# Altium PCB transmitter_2.PcbDoc
Units mm, origin at the board's own origin, x right, y up, seen from the top; angles counter-clockwise.
Board outline 99.5 x 89.75 mm, 2 copper layers (F.Cu, B.Cu); 60 components, 35 nets, 158 pads, 157 vias.
Unrouted connection lines stored in the file: 2.
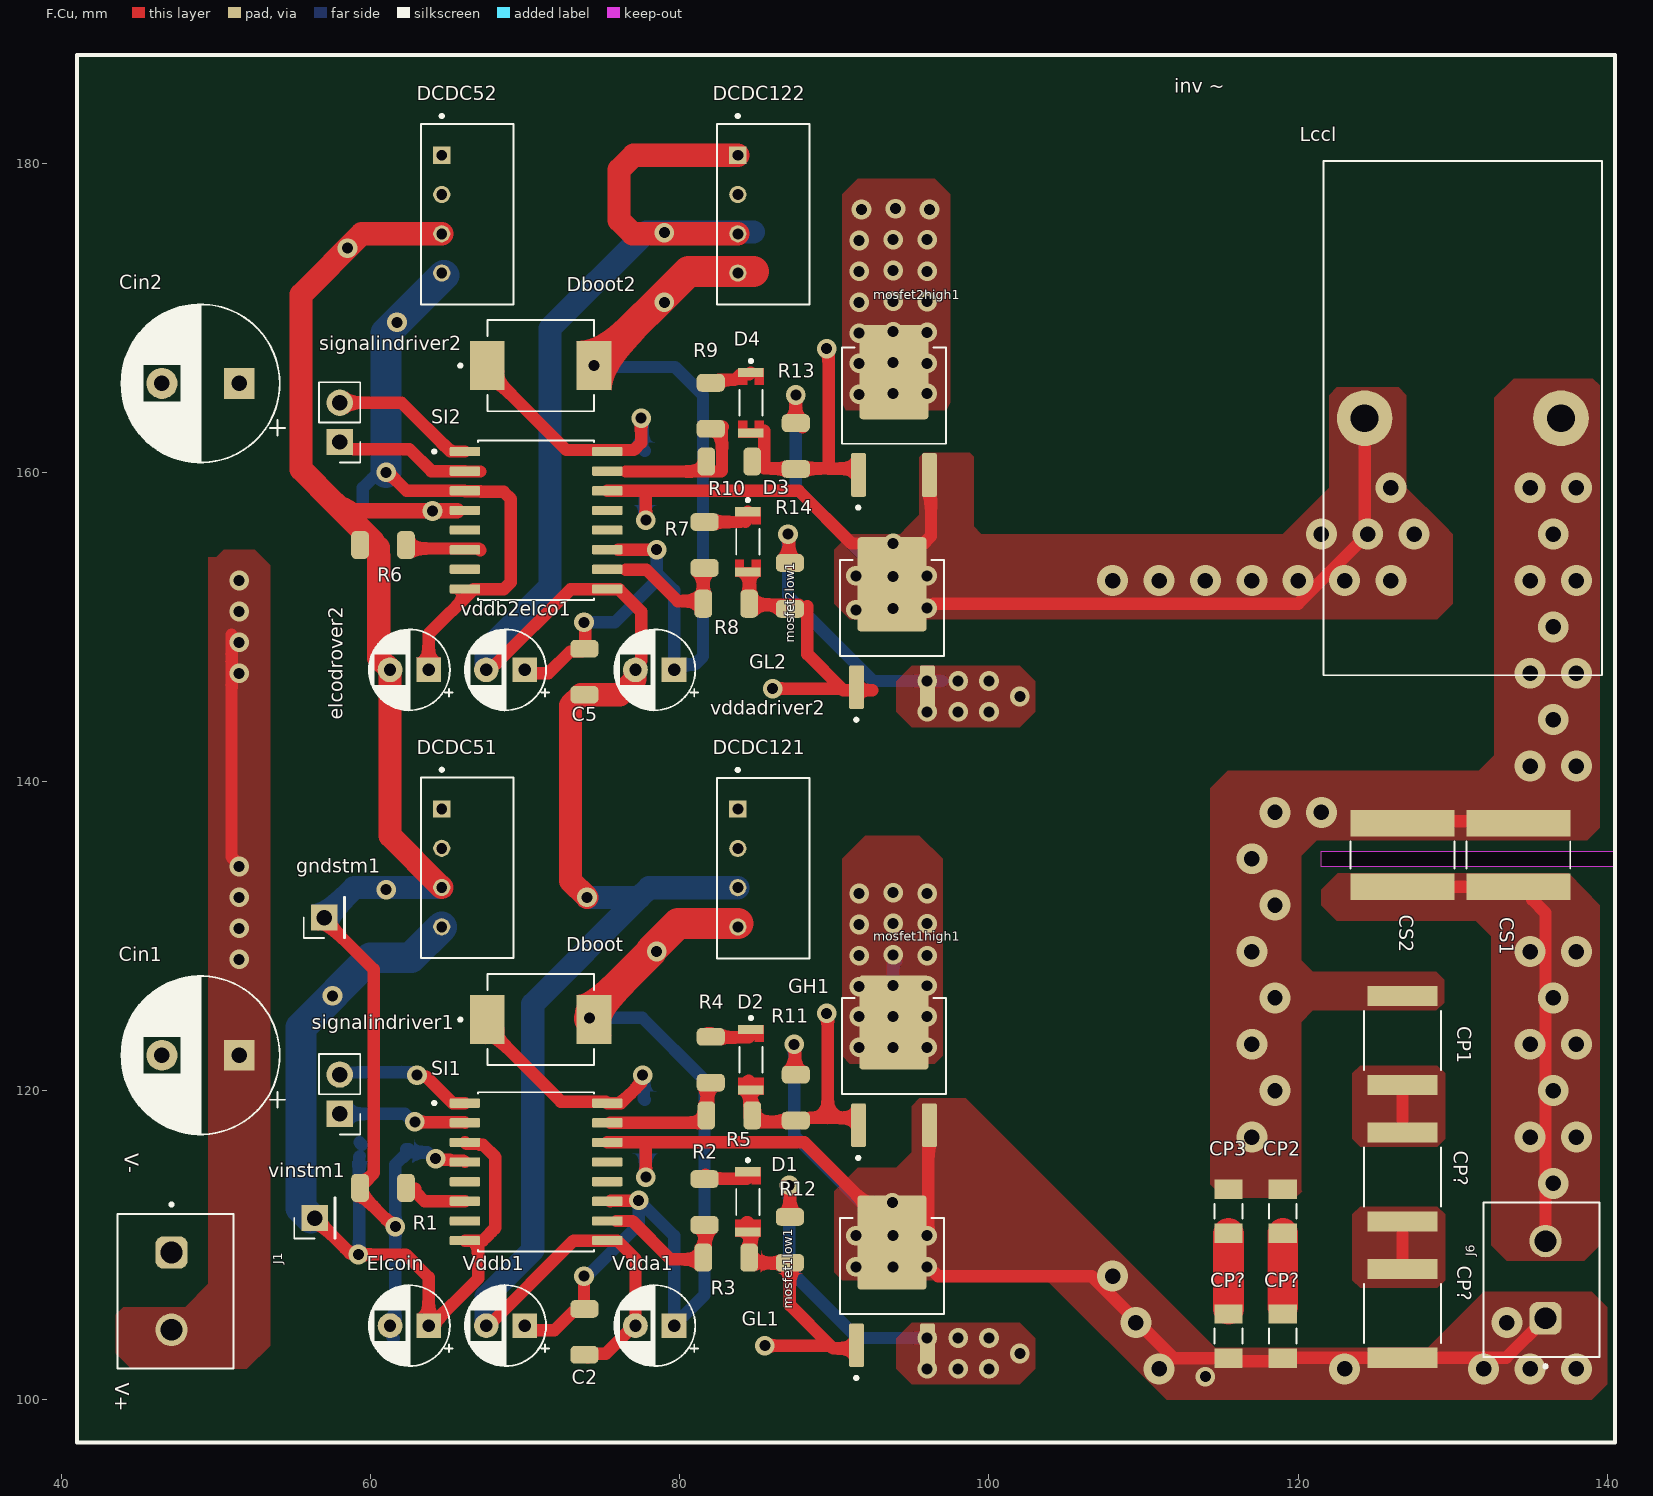
[diagram p0: F.Cu view]
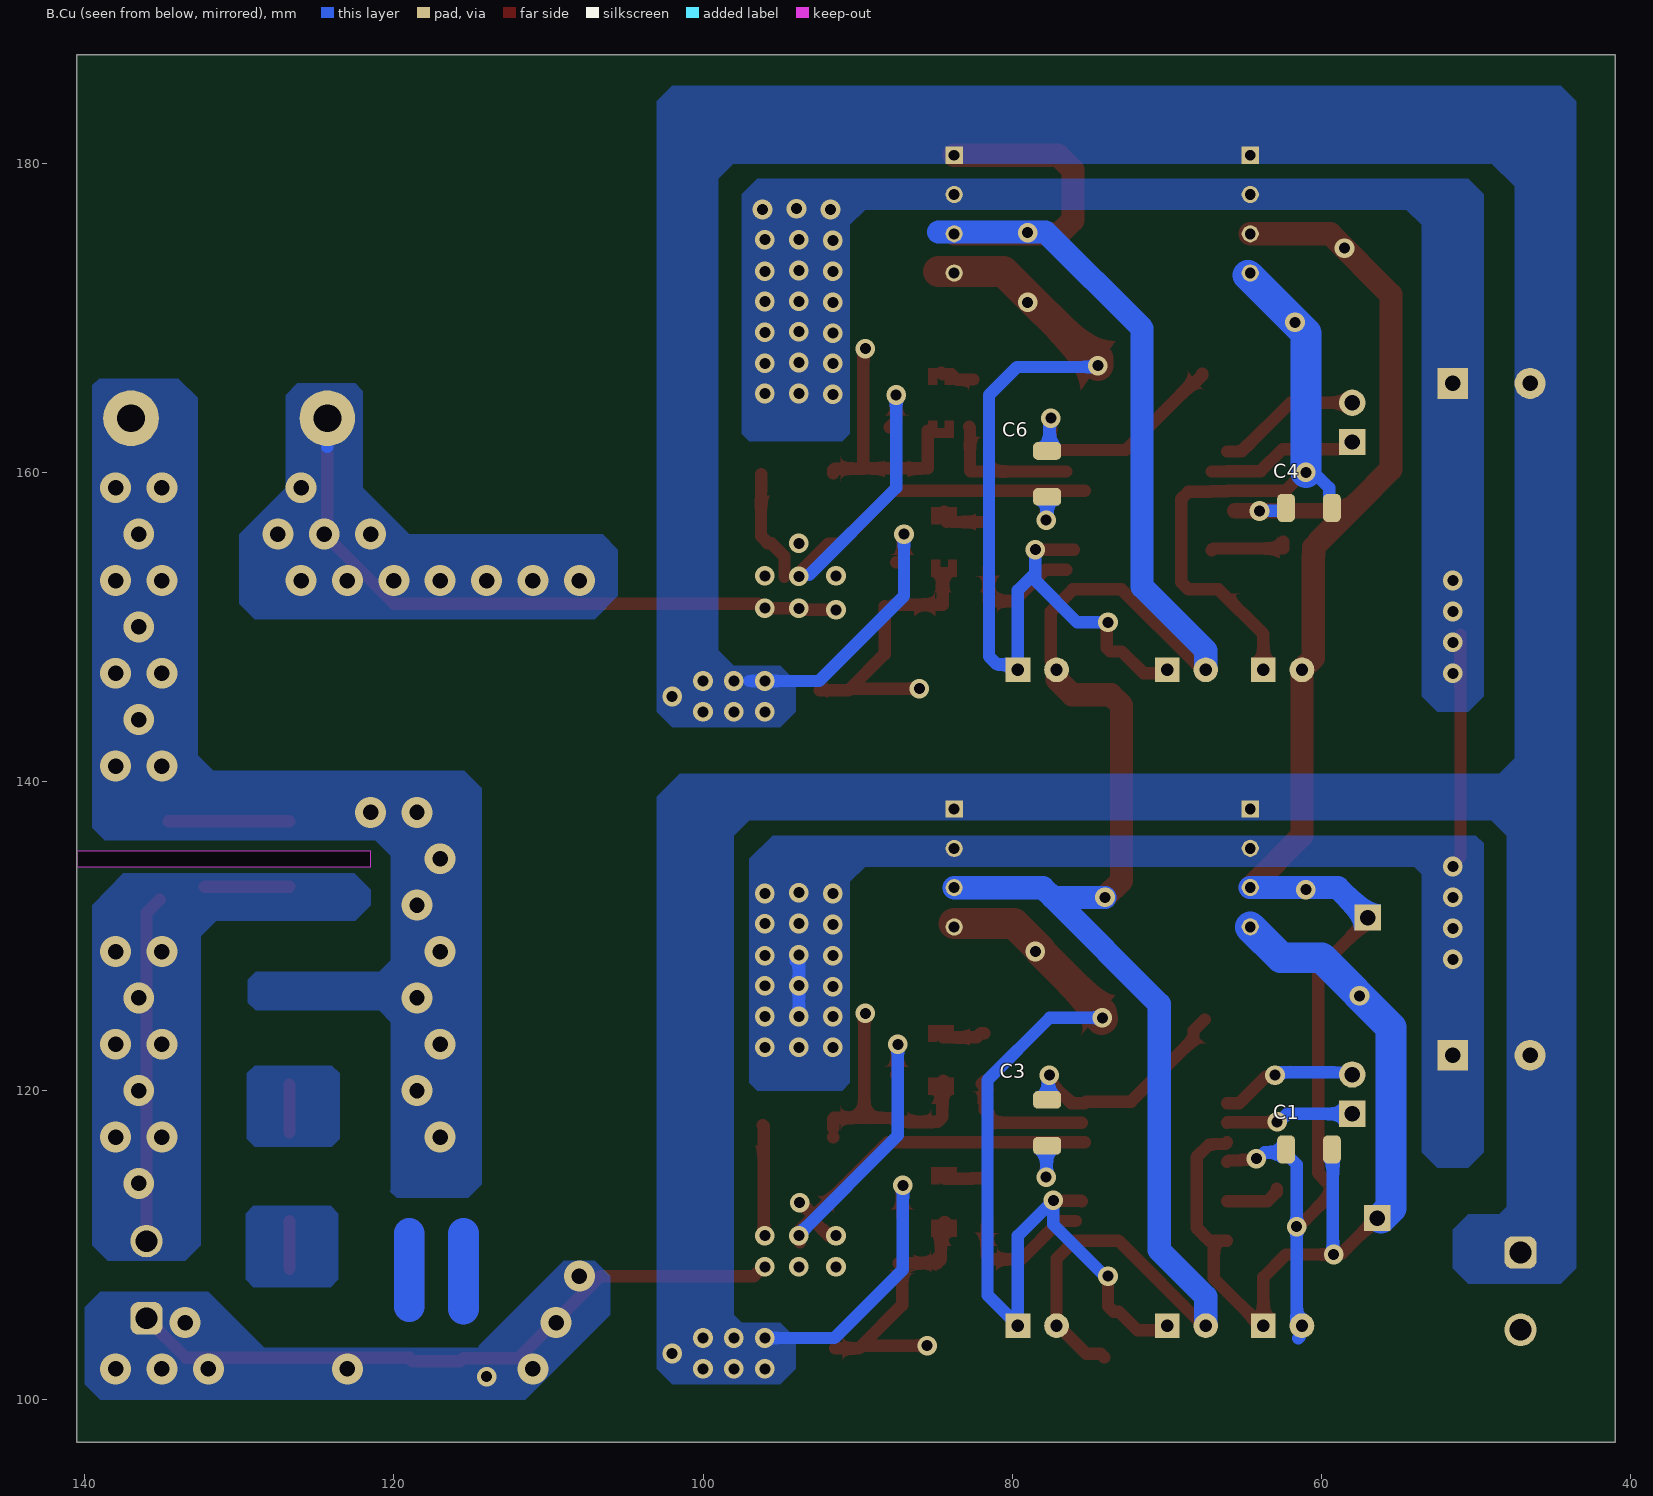
[diagram p1: B.Cu view, seen from below]
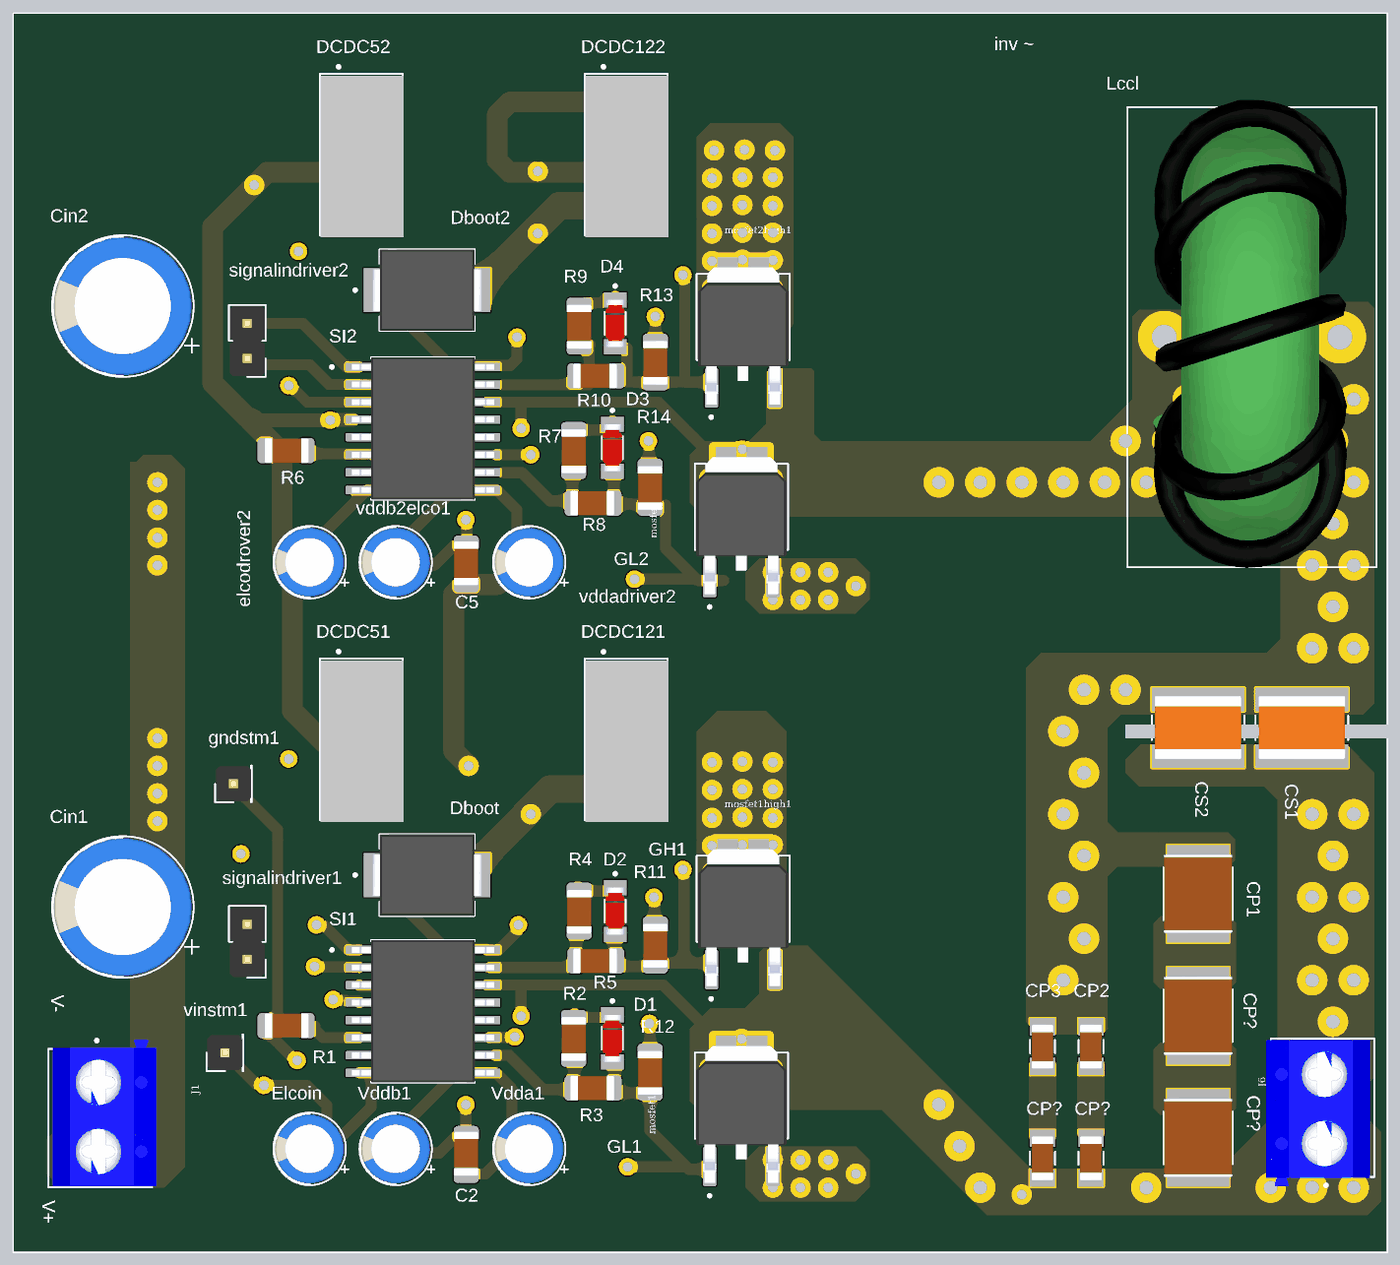
[diagram p2: 3D render of the assembled board from above, using the file's embedded part models]
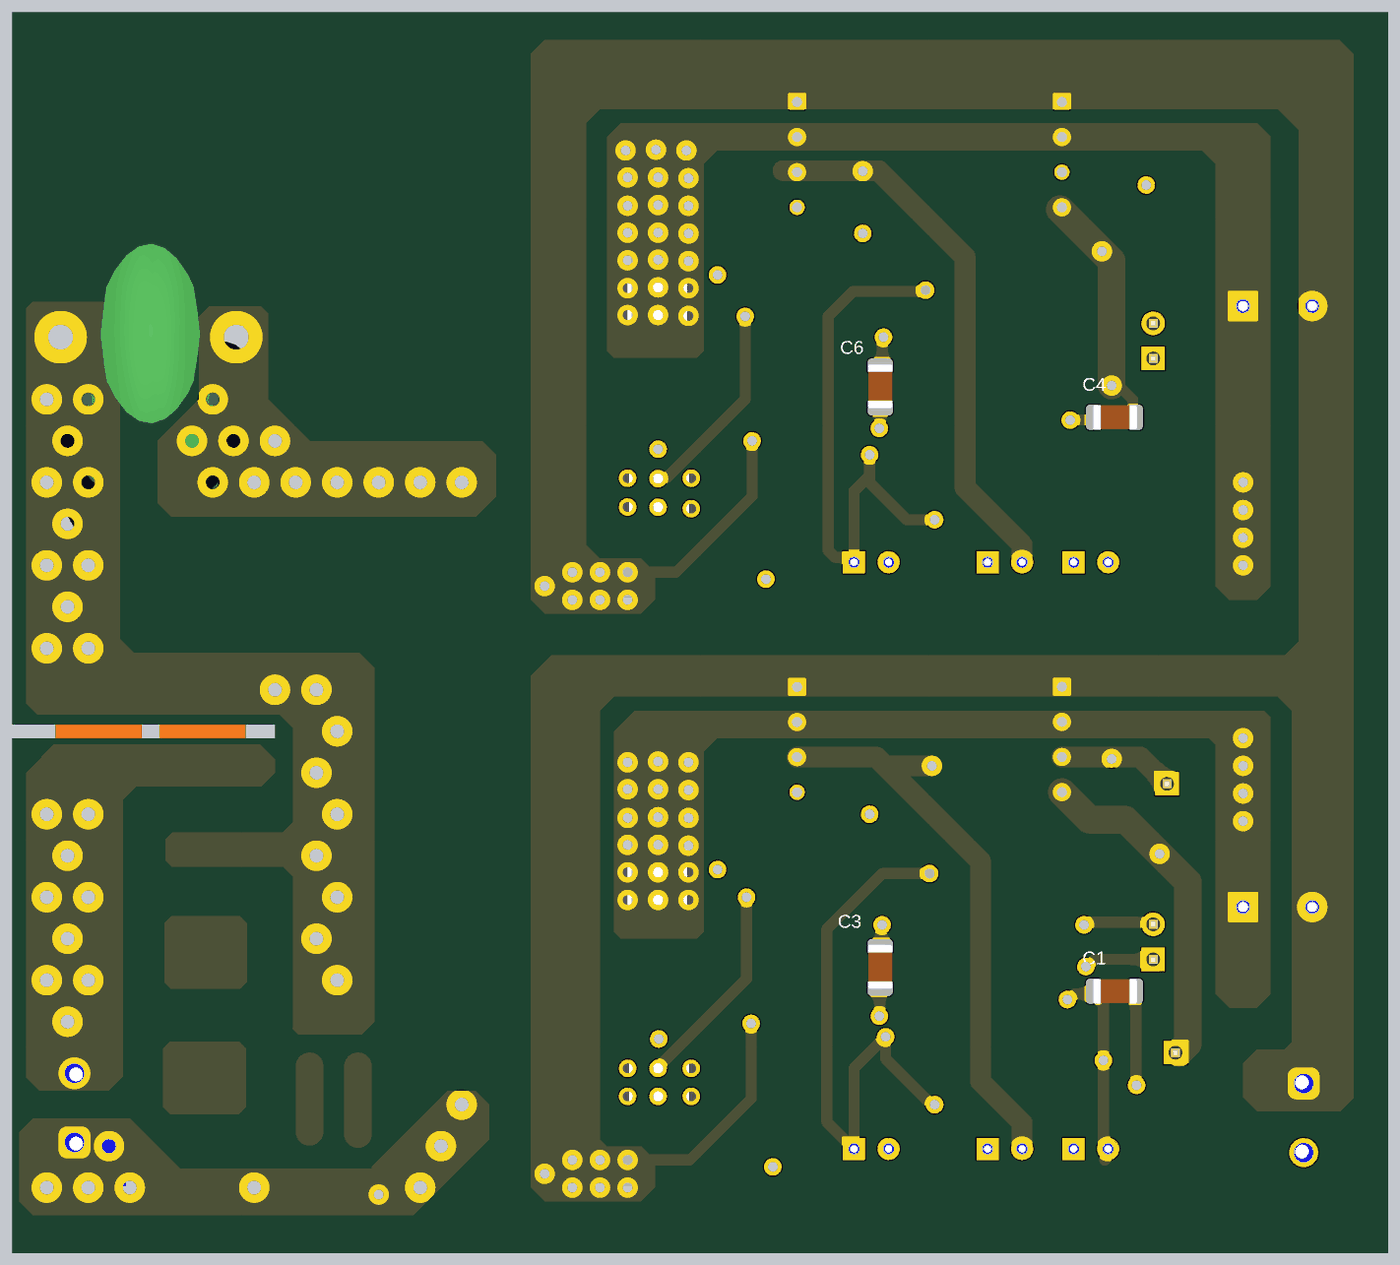
[diagram p3: 3D render of the assembled board from below, using the file's embedded part models]

## Layer stack, top to bottom
F.Mask: solder mask 0.0102, Solder Resist, Dk 3.5
F.Cu: signal copper 0.0356
Dielectric 1: dielectric 0.32, FR-4, Dk 4.8
B.Cu: signal copper 0.0356
B.Mask: solder mask 0.0102, Solder Resist, Dk 3.5

## Board outline
41,97.25 41,187 140.5,187 140.5,97.25
cut-out: 121.5,134.5 121.5,135.5 140.5,135.5 140.5,134.5

## Design rules (kind name [scope] priority, off if disabled: settings)
Clearance "Clearence 0,2_NetClass" [InNetClass('Default')] p1: gap=0.3 ignorepadtopadclearanceinfootprint=FALSE
ComponentClearance [All] p1: gap=0.254 collisioncheckmode=3 verticalgap=0 showdistances=FALSE
Height [All] p1: minheight=0 maxheight=100 prefheight=12.7
HoleSize "Hole Size (Default)" [All] p1: absolutevalues=TRUE maxlimit=10 minlimit=0 maxpercent=80.000 minpercent=20.000
MinimumSolderMaskSliver [All] p1: minsoldermaskwidth=0
PolygonConnect [All] p1: connectstyle=Direct reliefconductorwidth=0.254 reliefentries=4 polygonreliefangle="90 Angle" airgapwidth=0.254
RoutingVias [All] p1: holewidth=0.711 width=1.27 viastyle="Through Hole" minholewidth=0.711 minwidth=1.27 maxholewidth=0.711 maxwidth=1.27
SilkToSilkClearance [All] p1: silktosilkclearance=0
SilkToSolderMaskClearance [IsPad] p1: minsilkscreentomaskgap=0 clearancetoexposedcopper=TRUE
SolderMaskExpansion [All] p1: expansion=0.102 istentingtop=FALSE
Width [All] p1: maxlimit=10 minlimit=0.25 preferedwidth=0.8 minimp=50.000000 maximp=50.000000 favimp=50.000000
24 further rules are at their usual default settings.

## Components (designator, comment, footprint, x,y, rotation, side; value= is the part's Value field where it differs from the comment)
C1 "C_Small" 1206 60.8,116.2 r0 bottom
C2 "C_Small" 1206 73.829,104.4 r270 top
C3 "C_Small" 1206 77.738,117.923 r270 bottom
C4 "C_Small" 1206 60.8,157.7 r0 bottom
C5 "C_Small" 1206 73.829,147.1 r270 top
C6 "C_Small" 1206 77.738,159.9 r270 bottom
Cin1 "Elcofilter" C820uf25V 51.5,122.29 r180 top
Cin2 "Elcofilter" C820uf25V 51.5,165.75 r180 top
CP1 "MLCC_0.2uF" MLCC2220_0.2uF 126.75,123.25 r270 top
CP2 "MLCC_0.1uF" MLCC1206_0.1uF 119,112.2 r270 top
CP3 "MLCC_0.1uF" MLCC1206_0.1uF 115.5,112.2 r270 top
CP? "MLCC_0.1uF" MLCC1206_0.1uF 119,104.125 r270 top
CP? "MLCC_0.1uF" MLCC1206_0.1uF 115.5,104.125 r270 top
CP? "MLCC_0.2uF" MLCC2220_0.2uF 126.75,105.595 r270 top
CP? "MLCC_0.2uF" MLCC2220_0.2uF 126.75,114.422 r270 top
CS1 "MLCC_0.01uF" MLCC1825_0.01uF 134.25,135.25 r270 top
CS2 "MLCC_0.01uF" MLCC1825_0.01uF 126.75,135.25 r270 top
D1 "D_Small" DIO_LL4148 84.4,112.8 r270 top
D2 "D_Small" DIO_LL4148 84.6,122 r270 top
D3 "D_Small" DIO_LL4148 84.4,155.5 r270 top
D4 "D_Small" DIO_LL4148 84.6,164.5 r270 top
Dboot "D_Schottky" Schottky 71,124.6 r0 top
Dboot2 "D_Schottky" Schottky 71,166.9 r0 top
DCDC51 "B1205S_DCDC" DCDC5V 66.25,134.41 r270 top
DCDC52 "B1205S_DCDC" DCDC5V 66.25,176.7 r270 top
DCDC121 "B1212S_DCDC" DCDC5V 85.4,134.4 r270 top
DCDC122 "B1212S_DCDC" DCDC5V 85.4,176.7 r270 top
elcodrover2 "CP1_Small" CP_Radial_D5.0mm_P2.50mm 63.754,147.222 r180 top
Elcoin "CP1_Small" CP_Radial_D5.0mm_P2.50mm 63.754,104.8 r180 top
gndstm1 "Conn_01x01" PinHeader_1x01_P2.54mm_Vertical 57,131.2 r90 top
J1 "Screw_Terminal_01x02" Terminal 47.117,107.032 r270 top
J6 "Screw_Terminal_01x02" Terminal 136,107.768 r90 top
Lccl "L" Inductor 124.3,163.5 r90 top
mosfet1high1 "Q_NMOS_GDS" MOSFET 93.853,121.904 r90 top
mosfet1low1 "Q_NMOS_GDS" MOSFET 93.726,107.67 r90 top
mosfet2high1 "Q_NMOS_GDS" MOSFET 93.853,163.97 r90 top
mosfet2low1 "Q_NMOS_GDS" MOSFET 93.726,150.244 r90 top
R1 "R_Small" 1206 60.8,113.71 r180 top
R2 "R_Small" 1206 81.6,112.8 r90 top
R3 "R_Small" 1206 83,109.2 r0 top
R4 "R_Small" 1206 82,122 r90 top
R5 "R_Small" 1206 83.2,118.4 r0 top
R6 "R_Small" 1206 60.8,155.3 r180 top
R7 "R_Small" 1206 81.6,155.3 r90 top
R8 "R_Small" 1206 83,151.5 r0 top
R9 "R_Small" 1206 82,164.3 r90 top
R10 "R_Small" 1206 83.2,160.7 r0 top
R11 "R" 1206 87.503,119.55 r90 top
R12 "R" 1206 87.122,110.35 r90 top
R13 "R" 1206 87.503,161.7 r90 top
R14 "R" 1206 87.122,152.65 r90 top
SI1 "Si8233" Si8233 70.705,114.748 r0 top
SI2 "Si8233" Si8233 70.705,156.9 r0 top
signalindriver1 "Conn_01x02" PinHeader_1x02_P2.54mm_Vertical 58,118.5 r180 top
signalindriver2 "Conn_01x02" PinHeader_1x02_P2.54mm_Vertical 58,161.96 r180 top
Vdda1 "CP1_Small" CP_Radial_D5.0mm_P2.50mm 79.629,104.8 r180 top
vddadriver2 "CP1_Small" CP_Radial_D5.0mm_P2.50mm 79.629,147.222 r180 top
Vddb1 "CP1_Small" CP_Radial_D5.0mm_P2.50mm 69.977,104.8 r180 top
vddb2elco1 "CP1_Small" CP_Radial_D5.0mm_P2.50mm 69.977,147.222 r180 top
vinstm1 "Conn_01x01" PinHeader_1x01_P2.54mm_Vertical 56.388,111.76 r90 top

## Footprints (in the part's own frame and the unit in brackets; to place one, negate y for a bottom-side part, rotate by r counter-clockwise, add the part's x,y. Pads: shape width x height; smd on the part's side, far side on the other; paste and mask are expansions set on the pad)
1206 [mm]
  rrect54% 1.15x1.82 smd: 1(-1.485,0) 2(1.485,0)
  body extent -1.65,-0.9 1.55,0.9, height 1.56
C820uf25V [mm]
  rect 2x2 hole 1: 1(0,0)
  round 2 hole 1: 2(5,0)
  silkscreen extent -2.98,-5.12 7.62,5.12, body extent -2.5,-5 7.5,5, height 10
CP_Radial_D5.0mm_P2.50mm [mm]
  rect 1.6x1.6 hole 0.8: 1(0,0)
  round 1.6 hole 0.8: 2(2.5,0)
  silkscreen extent -1.55,-2.62 3.87,2.62, body extent -1.25,-2.5 3.75,2.5, height 5
DCDC5V [mm]
  rect 1.11x1.11 / inner round 1.11 / far side rect 1.11x1.11 hole 0.71: 1(-3.81,-1.65)
  round 1.11 hole 0.71: 2(-1.27,-1.65) 3(1.27,-1.65) 4(3.81,-1.65)
  silkscreen extent -6.45,-3 5.84,3, body extent -5.71,-2.95 5.97,3.05, height 10.77
DIO_LL4148 [mm]
  rect 0.6x1.65 smd: 1(-1.95,0) 2(1.95,0)
  F.Cu region: 2.25,-0.825 1.15,-0.825 1.15,-0.25 1.65,-0.25 1.65,0.25 1.15,0.25 1.15,0.825 2.25,0.825
  F.Cu region: -1.15,0.25 -1.65,0.25 -1.65,-0.25 -1.15,-0.25 -1.15,-0.825 -2.24,-0.825 -2.24,0.825 -1.15,0.825
  silkscreen extent -2.8,-0.75 0.83,0.75, body extent -1.7,-0.7 1.7,0.7, height 1.4
Inductor [mm]
  round 3.6 hole 1.8: 1(0,0) 2(0,-12.7)
  silkscreen extent -16.63,-15.36 16.63,2.66, body extent -23.39,-13.22 24.14,0.78, height 36.79
MLCC1206_0.1uF [mm]
  rect 1.25x1.82 smd: 1(-1.43,0) 2(1.43,0)
  silkscreen extent -0.48,-0.9 0.48,0.9, body extent -1.6,-0.8 1.6,0.8, height 1.8
MLCC1825_0.01uF [mm]
  rect 1.71x6.71 smd: 1(-2.05,0) 2(2.05,0)
  silkscreen extent -0.88,-3.35 0.88,3.35, body extent -2.31,-3.15 2.29,3.15, height 3.4
MLCC2220_0.2uF [mm]
  rect 1.3x4.5 smd: 1(-2.875,0) 2(2.875,0)
  silkscreen extent -1.91,-2.5 1.91,2.5, body extent -2.85,-2.5 2.85,2.5, height 2.8
MOSFET [mm]
  rrect25% 2.83x0.97 smd: 1(-4.14,2.29) 3(-4.14,-2.29)
  rrect10% 6.1x4.49 smd paste-4: 2(2.51,0)
  silkscreen extent -6.35,-3.37 4.1,3.37, body extent -5.33,-3.27 4.57,3.27, height 2.39
PinHeader_1x01_P2.54mm_Vertical [mm]
  rect 1.7x1.7 hole 1: 1(0,0)
  silkscreen extent -1.33,-1.33 1.33,1.33, body extent -1.27,-1.27 1.27,1.27, height 8.54
PinHeader_1x02_P2.54mm_Vertical [mm]
  rect 1.7x1.7 hole 1: 1(0,0)
  rrect100% 1.7x1.7 hole 1: 2(0,-2.54)
  silkscreen extent -1.33,-3.87 1.33,1.33, body extent -1.27,-3.81 1.27,1.27, height 8.54
Schottky [mm]
  rect 2.25x3.18 smd: A(3.455,0) C(-3.455,0)
  silkscreen extent -5.3,-2.95 3.44,2.95, body extent -3.98,-2.95 3.98,2.95, height 2.65
Si8233 [mm]
  rrect25% 1.97x0.6 smd: 1(-4.605,4.445) 2(-4.605,3.175) 3(-4.605,1.905) 4(-4.605,0.635) 5(-4.605,-0.635) 6(-4.605,-1.905) 7(-4.605,-3.175) 8(-4.605,-4.445) 9(4.605,-4.445) 10(4.605,-3.175) 11(4.605,-1.905) 12(4.605,-0.635) 13(4.605,0.635) 14(4.605,1.905) 15(4.605,3.175) 16(4.605,4.445)
  silkscreen extent -6.69,-5.15 3.75,5.15, body extent -5.15,-5.15 5.15,5.15, height 2.65
Terminal [mm]
  rrect50% 2.1x2.1 hole 1.4: 1(-2.5,0)
  round 2.1 hole 1.4: 2(2.5,0)
  silkscreen extent -5.7,-3.5 5,4, body extent -5.68,-3.18 4.92,4.32, height 10

## Via types
v1: diameter 1.27, hole 0.711, F.Cu to B.Cu, 109 vias
v2: diameter 2, hole 1, F.Cu to B.Cu, 48 vias

## Nets (pads, with @x,y where several pads share a name; then routed paths per layer and width w, separated by ;. In a path a pad name is that pad's centre, name@x,y a point inside that pad or via, vN(x,y) a via of type N, cw(c..) or ccw(c..) an arc to the next point about the centre after c; other vN are vias at no path point)
GNDB1: C2.2 C5.2 Cin1.2 Cin2.2 DCDC51.1 DCDC52.1 DCDC121.1 DCDC121.3 DCDC122.1 DCDC122.3 J1.1 mosfet1low1.3 mosfet2low1.3 R12.2 R14.2 SI1.9 SI2.9 Vdda1.2 vddadriver2.2 Vddb1.2 vddb2elco1.2 | length 192.4
  F.Cu w0.8: Vddb1.2@67.477,104.648 73.132,110.303 75.95,110.303 77.129,109.124 Vdda1.2 ; vddb2elco1.2 67.693,147.222 68.093,147.622 68.122,147.622 72.929,152.429 76.071,152.429 77.5,151 vddadriver2.2@77.5,147.809 ; C2.2@74.05,102.743 74.05,102.752 74.287,102.989 75.216,102.989 76.722,104.495 76.886,104.495 Vdda1.2@77.256,104.864 ; v1(87,156) 87.061,155.939 87.061,154.31 87.193,154.178 R14.2@87.5,154.178 ; v1(87.071,113.873) 87.122,113.822 R12.2
  F.Cu w1.5: C5.2@73.615,145.615 72.919,144.919 72.919,133.581 v1(74,132.5) ; C5.2 76.115,145.615 77.11,146.61 77.11,147.203 vddadriver2.2 ; DCDC122.3 76.949,175.43 76.07,176.309 76.07,179.57 77.01,180.51 DCDC122.1
  B.Cu w0.8: v1(87,156) 87,152 92.5,146.5 97,146.5 ; v1(87.071,113.873) 87.071,108.429 91.5,104 v1(96,104)
  B.Cu w1.5: Vddb1.2@67.477,104.902 67.477,106.677 70.485,109.685 70.485,125.603 77.382,132.5 ; vddb2elco1.2 67.477,148.477 71.6,152.6 71.6,169.308 77.835,175.543 84.76,175.543 ; v1(74,132.5) 77.382,132.5 ; DCDC121.3 78.012,133.13 77.382,132.5
  other v1: 96,102 98,102 100,102 102,103 98,104 100,104 96,144.5 98,144.5 100,144.5 102,145.5 96,146.5 98,146.5 100,146.5 79,175.5
GNDI: C1.2 C4.2 DCDC51.3 DCDC52.3 elcodrover2.2 Elcoin.2 gndstm1.1 R1.2 R6.2 SI1.4 SI2.4 | length 108.5
  F.Cu w0.8: gndstm1.1@57,131.048 57.152,131.048 57.45,130.75 57.45,130.597 60.2,127.847 60.2,114.688 59.731,114.22 59.49,114.22 59.315,114.045 R1.2 ; R1.2@59.315,113.375 61.49,111.2 v1(61.6,111.2) ; v1(64.2,115.6) 64.264,115.536 65.131,115.536 65.183,115.483 66,115.483 SI1.4
  F.Cu w1: 58.5,157.5 v1(64,157.5) 64.017,157.518 SI2.4@65.615,157.518
  F.Cu w1.5: 57.679,158.007 55.5,160.186 55.5,171.5 59.43,175.43 DCDC52.3 ; 57.785,157.901 58.162,157.524 60.226,155.46 ; 58.268,157.63 58.5,157.5 ; 60.49,155.14 60.49,154.635 60.525,154.6 60.525,147.978 61.254,147.249 elcodrover2.2 61.254,136.486 64.47,133.27 DCDC51.3
  B.Cu w0.8: Elcoin.2 61.407,104.647 61.407,104.081 61.5,103.988 ; Elcoin.2@61.595,105.136 61.595,115.221 62.064,115.69 62.11,115.69 62.285,115.865 C1.2 ; C1.2@62.46,116.2 62.46,116.011 63.662,116.011 64.073,115.6 v1(64.2,115.6) ; C4.2@62.46,157.5 62.46,157.524 63.976,157.524 v1(64,157.5)
  B.Cu w1.5: gndstm1.1 58.94,133.14 DCDC51.3
  other v1: 61,133 58.5,174.5
HS1: C3.2 CP?.2@115.5,102.695 CP?.2@119,102.695 CP?.2@126.75,102.72 J6.1 mosfet1high1.3 mosfet1low1.2 R11.2 SI1.14 | length 97.2
  F.Cu w0.8: SI1.14 77.841,116.653 ; v1(77.8,114.4) 77.8,116.612 77.841,116.653 ; v1(87.4,123) 87.452,122.948 87.452,121.087 R11.2 ; v1(91.4,110.626) 91.881,110.626 92.743,111.487 mosfet1low1.2@92.743,111.968 ; mosfet1low1.2@92.888,111.968 93.67,112.75 v1(93.75,112.75) ; mosfet1low1.2 93.726,110.985 92.983,111.728 mosfet1low1.2@92.743,111.968 ; v1(96,108.6) 96.104,108.6 96.704,108 106.637,108 111.942,102.695 115.5,102.695 115.695,102.5 118.805,102.5 CP?.2@119,102.695 ; v1(96,110.626) 96.071,110.697 96.071,117.692 mosfet1high1.3 ; CP?.2@119,102.72 121.906,102.72 126.75,102.72 133.452,102.72 J6.1 ; 77.841,116.653 88.058,116.653 mosfet1low1.2@92.743,111.968
  B.Cu w0.8: C3.2 77.769,116.407 77.769,114.431 v1(77.8,114.4) ; v1(87.4,123) 87.4,117.107 93.8,110.707 v1(93.8,110.626)
  other v1: 114,101.5 91.4,108.6 93.8,108.6
  other v2: 111,102 123,102 132,102 135,102 138,102 109.5,105 133.5,105 108,108
HS2: C6.2 Lccl.1 mosfet2high1.3 mosfet2low1.2 R13.2 SI2.14 | length 93.5
  F.Cu w0.8: SI2.14 77.769,158.805 ; v1(77.8,156.9) 77.8,158.774 77.769,158.805 ; v1(87.5,165) 87.5,163.344 R13.2@87.938,162.906 ; v1(91.4,151.1) 93.7,151.1 mosfet2low1.2@93.8,151 ; v1(93.8,151.203) mosfet2low1.2@93.8,151 ; v1(93.8,153.27) 93.8,153.475 91.881,155.394 91.106,155.394 87.695,158.805 77.769,158.805 ; mosfet2low1.2@94.726,153.241 94.726,154.559 95.571,155.404 95.781,155.404 96.25,155.873 96.25,158.793 96.228,158.815 mosfet2high1.3@96.228,159.882 ; Lccl.1 124.3,155.8 120,151.5 96.411,151.5 96.127,151.216 v1(96,151.216) 96,151 95.784,151.216 94.016,151.216 mosfet2low1.2@93.8,151
  B.Cu w0.8: v1@77.738,157.086 C6.2 ; v1(87.5,165) 87.5,159 93.14,153.36 93.71,153.36 v1(93.8,153.27) ; 124.3,161.64 Lccl.1
  other v1: 91.4,153.3 96,153.3 93.8,155.4
  other v2: 108,153 111,153 114,153 117,153 120,153 123,153 126,153 121.5,156 124.5,156 127.5,156 126,159
NetC3_1: C3.1 Dboot.C SI1.16 | length 15.2
  F.Cu w0.8: Dboot.C 68.27,123.875 68.27,123.33 72.307,119.293 75.21,119.293 SI1.16 76.193,119.193 77.51,120.51 77.51,120.91 v1(77.6,121)
  B.Cu w0.8: v1(77.6,121) 77.669,120.931 77.669,119.477 C3.1
NetC6_1: C6.1 Dboot2.C SI2.16 | length 15.9
  F.Cu w0.8: Dboot2.C@67.711,166.389 67.711,166.269 68.27,165.71 68.39,165.71 72.655,161.445 77.031,161.445 77.5,161.914 v1(77.5,163.5)
  B.Cu w0.8: v1(77.5,163.5) 77.59,163.41 77.59,161.533 C6.1
NetCP1_1: CP1.1 CP2.1 CP3.1 CS1.1 CS2.1 Lccl.2 | length 7.8
  F.Cu w0.8: CS2.1@126.75,137.42 CS1.1@134.58,137.42
  other v2: 117,117 118.5,120 117,123 118.5,126 117,129 118.5,132 117,135 118.5,138 121.5,138 135,141 138,141 136.5,144 135,147 138,147 136.5,150 135,153 138,153 136.5,156 135,159 138,159
NetCP1_2: CP1.2 CP?.1@126.75,117.297 | length 3.1
  F.Cu w0.8: CP?.1@126.75,117.297 CP1.2
NetCP2_2: CP2.2 CP?.1@119,105.555 | length 9.5
  F.Cu w2: CP?.1@119,106.037 CP2.2
  B.Cu w2: 119,106.037 119,110.77
NetCP3_2: CP3.2 CP?.1@115.5,105.555 | length 9.8
  F.Cu w2: CP?.1@115.5,105.875 CP3.2
  B.Cu w2: 115.5,105.875 115.5,110.77
NetCP?_1: CP?.1@126.75,108.47 CP?.2@126.75,111.547 | length 3.1
  F.Cu w0.8: CP?.1@126.75,108.47 CP?.2@126.75,111.547
NetCS1_2: CS1.2 CS2.2 J6.2 | length 28.1
  F.Cu w0.8: CS2.2 CS1.2@132.25,133.2 ; CS1.2@135.153,132.347 136,131.5 J6.2
  B.Cu w0.8: J6.2@135.922,110.145 136,110.223 J6.2
  other v2: 136.5,114 135,117 138,117 136.5,120 135,123 138,123 136.5,126 135,129 138,129
NetD1_1: D1.1 R2.2 | length 2.8
  F.Cu w0.8: R2.2@81.661,114.58 81.911,114.33 82.578,114.33 82.605,114.303 84.328,114.303
NetD2_1: D2.1 R4.2 | length 2.8
  F.Cu w0.8: R4.2@81.788,123.724 82.013,123.724 82.29,123.447 84.455,123.447
NetD3_1: D3.1 R7.2 | length 3.9
  F.Cu w0.8: R7.2 83.91,156.785 84.379,157.254 84.379,157.429 D3.1 84.3,157.35 84.275,157.35 84.275,157.006 84.25,156.981 84.25,156.785
NetD4_1: D4.1 R9.2 | length 2.3
  F.Cu w0.8: R9.2@82.5,166 83.606,166 83.956,166.35 84.5,166.35 D4.1
NetR1_1: R1.1 SI1.6 | length 3.7
  F.Cu w0.8: 62.891,113.665 62.891,113.44 63.488,112.843 SI1.6
NetR2_1: R2.1 R3.1 SI1.10 | length 8.8
  F.Cu w0.8: SI1.10@75.895,111.573 76.927,111.573 79.407,109.093 R3.1@81.508,109.093 ; R3.1 81.659,109.344 81.659,111.256 R2.1
NetR4_1: R4.1 R5.1 SI1.15 | length 8.9
  F.Cu w0.8: SI1.15@75.5,117.923 81.232,117.923 81.482,118.173 81.482,118.237 81.482,118.462 81.788,118.768 81.788,120.624 R4.1@81.967,120.445
NetR6_1: R6.1 SI2.6 | length 5.1
  F.Cu w0.8: R6.1@62.46,155.5 62.46,155.069 67,155.069 67.1,154.969
NetR7_1: R7.1 R8.1 SI2.10 | length 8
  F.Cu w0.8: 76.5,153.699 77.835,153.699 79.867,151.667 81.515,151.667 R7.1@81.515,153.825
NetR9_1: R9.1 R10.1 SI2.15 | length 9.1
  F.Cu w0.8: 76.5,160.049 82.678,160.049 82.732,160.103 82.732,161.5 82.732,162.888 R9.1@82.788,162.944
NetSI1_1: SI1.1 signalindriver1.2 | length 8.9
  F.Cu w0.8: v1(63,121) 63.09,120.91 63.59,120.91 65.307,119.193 SI1.1
  B.Cu w0.8: signalindriver1.2@58,121.172 59.172,121.172 59.2,121.2 62.673,121.2 62.873,121 v1(63,121)
NetSI1_2: SI1.2 signalindriver1.1 | length 8.5
  F.Cu w0.8: v1(62.865,117.983) 62.895,117.953 66.07,117.953 SI1.2
  B.Cu w0.8: signalindriver1.1 62.221,118.5 62.738,117.983 v1(62.865,117.983) ; signalindriver1.1@58.044,118.743 signalindriver1.1@58.135,118.833
NetSI2_1: SI2.1 signalindriver2.2 | length 9.4
  F.Cu w0.8: signalindriver2.2 62,164.5 65.155,161.345 SI2.1
NetSI2_2: SI2.2 signalindriver2.1 | length 10.1
  F.Cu w0.8: signalindriver2.1 58.45,161.51 58.909,161.51 58.919,161.5 62.5,161.5 63.925,160.075 SI2.2 ; SI2.2@65.897,160.049 67.1,160.049
V+: Cin1.1 Cin2.1 DCDC51.2 DCDC52.2 DCDC121.2 DCDC122.2 J1.2 mosfet1high1.2 mosfet2high1.2 | length 19
  F.Cu w0.8: 51,149.5 51,135.127 51.5,134.627 v1(51.5,134.5)
  B.Cu w0.8: v1(93.8,124.8) 93.8,128.173 94,128.373 v1@94,128.5
  other v1: 91.6,122.8 93.8,122.8 96,122.8 91.6,124.8 96,124.8 91.6,126.729 93.8,126.79 96,126.787 51.5,128.5 91.6,128.734 96,128.734 93.8,128.79 51.5,130.5 91.6,130.75 93.8,130.811 96,130.808 51.5,132.5 91.6,132.755 96,132.755 93.8,132.811 51.5,147 51.5,149 51.5,151 51.5,153 91.6,165.039 93.8,165.1 96,165.097 91.6,167.044 96,167.044 93.8,167.1 91.6,169 96,169.058 93.8,169.1 91.6,170.995 93.8,171.056 96,171.053 91.6,173 96,173 93.8,173.056 91.6,174.995 93.8,175.056 96,175.053 91.75,177 96.15,177 93.95,177.056
VDDA1: C2.1 Dboot.A DCDC121.4 SI1.11 Vdda1.1 Vddb1.1 | length 62.3
  F.Cu w0.8: Vddb1.1 70.277,104.5 71.894,104.5 73.104,105.71 73.45,105.71 73.8,106.06 v1(73.8,108) ; SI1.11@75.5,112.843 75.53,112.873 77.313,112.873 v1(77.343,112.903)
  F.Cu w2: v1(74.168,124.714) 74.168,124.639 Dboot.A@74.22,124.587 ; Dboot.A@74.22,124.766 74.22,125.052 78.126,128.958 78.126,129.053 79.883,130.81 DCDC121.4@83.76,130.81
  B.Cu w0.8: v1@73.804,107.804 73.804,107.876 74.162,108.235 74.235,108.235 77.343,111.343 v1(77.343,112.903) 79.629,110.617 Vdda1.1 81.6,106.771 81.6,120.685 77.571,124.714 v1(74.168,124.714)
  other v1: 78.5,129
VDDA2: C5.1 Dboot2.A DCDC122.4 SI2.11 vddadriver2.1 vddb2elco1.1 | length 62.8
  F.Cu w0.8: vddb2elco1.1@70.038,147 70.046,147.008 71.508,147.008 72.91,148.41 73.654,148.41 73.876,148.633 v1@73.876,150.083 ; SI2.11@76.005,154.995 76.1,154.995 76.105,155 v1(78.5,155)
  F.Cu w2: v1(74.455,166.9) 74.455,167.365 74.58,167.49 75.045,167.49 80.558,173.003 84.76,173.003
  B.Cu w0.8: v1(73.8,150.3) 75.8,150.3 78.5,153 78.5,153.5 ; v1(74.455,166.9) 74.545,166.81 79.69,166.81 81.5,165 81.5,148.093 80.978,147.571 79.978,147.571 vddadriver2.1 ; v1(78.5,155) 78.5,153.5 ; vddadriver2.1@79.629,147.571 79.629,152.371 78.5,153.5
  other v1: 79,171
VDDI1: C1.1 DCDC51.4 Elcoin.1 SI1.3 SI1.8 vinstm1.1 | length 59.9
  F.Cu w0.8: vinstm1.1@56.134,111.76 vinstm1.1 58.658,109.49 59.11,109.49 v1(59.2,109.4) 62.285,109.4 63.754,107.931 63.754,104.648 66.962,107.856 66.962,110.091 SI1.8@66.75,110.303 ; SI1.8 SI1.8@66.75,110.303 ; SI1.3 66.2,116.553 67.017,116.553 67.07,116.5 67.269,116.5 68.072,115.697 68.072,111.125 67.826,110.879 67.547,110.6 67.25,110.303 SI1.8@66.75,110.303
  B.Cu w0.8: v1(59.2,109.4) 59.258,109.458 59.258,115.712 C1.1@59.315,115.769 ; C1.1@59.276,116.659 C1.1@59.441,116.494
  B.Cu w2: vinstm1.1@56.134,111.76 55.5,112.394 55.5,124.1 60,128.6 62.6,128.6 DCDC51.4
  other v1: 57.535,126.135
VDDI2: C4.1 DCDC52.4 elcodrover2.1 SI2.3 SI2.8 | length 41
  F.Cu w0.8: v1(61,160) 61.127,160 62.322,158.805 66.074,158.805 66.1,158.779 67.1,158.779 67.139,158.74 68.603,158.74 69.072,158.271 69.072,152.898 68.603,152.429 67.1,152.429 66.65,152.429 63.754,149.533 elcodrover2.1@63.754,146.974
  B.Cu w0.8: C4.1 59.49,157.875 59.49,158.99 60.41,159.91 60.91,159.91 v1(61,160)
  B.Cu w2: v1(61,160) 61,169 DCDC52.4@64.75,172.75
  other v1: 61.707,169.707
VOA1: D2.2 mosfet1high1.1 R5.2 R11.1 | length 17.5
  F.Cu w0.8: 84.216,120.408 84.455,120.647 84.519,120.584 84.519,118.3 84.582,118.237 84.582,118.233 84.832,117.983 87.503,117.983 87.753,118.233 88.443,118.233 88.447,118.237 89.57,118.237 ; v1(89.5,125) 89.57,124.93 89.57,118.237 ; mosfet1high1.1@91.573,116.973 mosfet1high1.1@91.573,117 ; mosfet1high1.1@91.573,117.564 91.573,118.167 91.503,118.237 89.57,118.237
VOA2: D4.2 mosfet2high1.1 R10.2 R13.1 | length 16.4
  F.Cu w0.8: 85.455,162.7 85.455,160.253 87.503,160.253 89.63,160.253 89.63,167.537 89.59,167.578 89.59,167.79 v1@89.63,167.83 ; 89.646,160.237 91.478,160.237 91.563,160.152 mosfet2high1.1@91.563,159.931
  other v1: 89.5,168
VOB1: D1.2 mosfet1low1.1 R3.2 R12.1 | length 17.8
  F.Cu w0.8: 84.328,111.503 84.383,111.503 84.608,111.278 84.608,109.089 84.858,108.839 R12.1@87.347,108.839 ; v1(85.5,103.5) 89.746,103.5 ; R12.1@87.122,108.839 87.122,106.124 89.746,103.5 ; mosfet1low1.1@91.446,103.33 89.916,103.33 89.746,103.5
VOB2: D3.2 mosfet2low1.1 R8.2 R14.1 | length 17.8
  F.Cu w0.8: D3.2@84.5,153.304 84.5,151.442 R14.1@87.698,151.442 ; v1(86,146) 90.487,146 ; 88.249,151.347 88.249,148.238 90.487,146 ; 92.446,145.904 90.583,145.904 90.487,146
pads on no net: SI1.5 SI1.7 SI1.12 SI1.13 SI2.5 SI2.7 SI2.12 SI2.13

## Polygon pours and split planes (outlines as drawn)
HS1 on B.Cu "NONET_L-01_P-001" (solid, pour order 67): 114.5,103.37 114.5,103.5 109,109 107,109 106,108 106,105.5 111.5,100 139,100 140,101 140,106 139,107 132,107 128.37,103.37
NetCP?_1 on B.Cu "NONET_L-01_P-001" (solid, pour order 73): 129.09,107.299 129.59,107.799 129.59,112.049 129.09,112.549 124.09,112.549 123.59,112.049 123.59,107.799 124.09,107.299
NetCP1_1 on B.Cu "NONET_L-01_P-001" (solid, pour order 71): 120.19,124.44 120.94,125.19 128.94,125.19 129.44,125.69 129.44,127.19 128.94,127.69 120.94,127.69 120.19,128.44 120.19,135.19 121.19,136.19 123.69,136.19 138.69,136.19 139.5,137 139.5,165.62 139.06,166.06 133.94,166.06 132.69,164.81 132.69,141.69 131.69,140.69 115.44,140.69 114.31,139.56 114.31,113.94 115.19,113.06 119.81,113.06 120.25,113.5 120.19,113.56
HS2 on B.Cu "NONET_L-01_P-001" (solid, pour order 66): 127,165 127,159 130,156 130,151.5 129,150.5 107,150.5 105.5,152 105.5,155 106.5,156 119,156 122,159 122,165.25 122.5,165.75 126.25,165.75
NetCP1_2 on B.Cu "NONET_L-01_P-001" (solid, pour order 72): 129,116.375 129.5,116.875 129.5,121.125 129,121.625 124,121.625 123.5,121.125 123.5,116.875 124,116.375
NetCS1_2 on B.Cu "NONET_L-01_P-001" (solid, pour order 76): 139.5,132 137.5,134.055 122.555,134.055 121.5,133 121.5,132 122.5,131 131.5,131 132.5,130 132.5,110 133.5,109 138.5,109 139.5,110
V+ on B.Cu "NONET_L-01_P-001" (solid, pour order 65): 97,162 97.5,162.5 97.5,178 96.5,179 50.5,179 49.5,178 49.5,145.5 50.5,144.5 52.5,144.5 53.5,145.5 53.5,176 54.5,177 89.5,177 90.5,176 90.5,162.5 91,162
V+ on B.Cu "NONET_L-01_P-001" (solid, pour order 62): 49.5,136 50,136.5 95.5,136.5 97,135 97,120.5 96.5,120 91,120 90.5,120.5 90.5,133.5 89.5,134.5 54,134.5 53.5,134 53.5,116 52.5,115 50.5,115 49.5,116
GNDB1 on B.Cu "NONET_L-01_P-001" (solid, pour order 47): 103,144.5 103,184 102,185 44.5,185 43.5,184 43.5,108.5 44.5,107.5 50.5,107.5 51.5,108.5 51.5,111 50.5,112 48.5,112 48,112.5 48,136.5 49,137.5 97,137.5 98,136.5 98,105.5 97.5,105 95,105 94,104 94,102 95,101 102,101 103,102 103,139 101.5,140.5 48.5,140.5 47.5,141.5 47.5,178.5 49,180 49.033,179.967 97.967,179.967 98,180 99,179 99,148.5 98,147.5 96,147.5 95,147.5 95,147.476 94,146.476 94,144.5 95,143.5 102,143.5
HS1 on F.Cu "NONET_L-01_P-001" (solid, pour order 81): 140,106 140,101 139,100 111.5,100 103.75,107.75 90.5,107.75 90,108.25 90,113.5 91.5,115 94,115 95,116 95,119 95.5,119.5 98.5,119.5 114.63,103.37 128.413,103.37 128.413,103.413 132,107 139,107
NetCP1_1 on F.Cu "NONET_L-01_P-001" (solid, pour order 80): 120.19,124.44 120.94,125.19 128.94,125.19 129.44,125.69 129.44,127.19 128.94,127.69 120.94,127.69 120.19,128.44 120.19,135.19 121.19,136.19 123.69,136.19 138.69,136.19 139.5,137 139.5,165.62 139.06,166.06 133.94,166.06 132.69,164.81 132.69,141.69 131.69,140.69 115.44,140.69 114.31,139.56 114.31,113.94 115.19,113.06 119.81,113.06 120.25,113.5 120.19,113.56
HS2 on F.Cu "NONET_L-01_P-001" (solid, pour order 82): 119,156 122,159 122,165 122.5,165.5 126.5,165.5 127,165 127,159 129.5,156.5 130,156 130,151.5 129,150.5 91,150.5 90,151.5 90,155 91,156 94.25,156 94.75,156.5 95.5,157.25 95.5,160.965 95.785,161.25 98.75,161.25 99,161 99,156.5 99.5,156
NetCS1_2 on F.Cu "NONET_L-01_P-001" (solid, pour order 77): 139.5,132 137.5,134.055 122.555,134.055 121.5,133 121.5,132 122.5,131 131.5,131 132.5,130 132.5,110 133.5,109 138.5,109 139.5,110
NetCP?_1 on F.Cu "NONET_L-01_P-001" (solid, pour order 78): 129,107.25 129.5,107.75 129.5,112 129,112.5 124,112.5 123.5,112 123.5,107.75 124,107.25
NetCP1_2 on F.Cu "NONET_L-01_P-001" (solid, pour order 79): 129,116.375 129.5,116.875 129.5,121.125 129,121.625 124,121.625 123.5,121.125 123.5,116.875 124,116.375
V+ on F.Cu "NONET_L-01_P-001" (solid, pour order 70): 97,122.25 96.5,121.75 91,121.75 90.5,122.25 90.5,135 92,136.5 95.5,136.5 97,135
V+ on F.Cu "NONET_L-01_P-001" (solid, pour order 68): 90.5,178 91.5,179 96.5,179 97.5,178 97.5,164.5 97.25,164 90.75,164 90.5,164.5
V+ on F.Cu "NONET_L-01_P-001" (solid, pour order 64): 53.5,154 52.5,155 50.5,155 50,154.5 49.5,154.5 49.5,107.5 48,106 44,106 43.5,105.5 43.5,103 44.5,102 52,102 53.5,103.5
GNDB1 on F.Cu "NONET_L-01_P-001" (solid, pour order 58): 102,143.5 95,143.5 94,144.5 94,146.5 95,147.5 102,147.5 103,146.5 103,144.5
GNDB1 on F.Cu "NONET_L-01_P-001" (solid, pour order 48): 102,101 95,101 94,102 94,104 95,105 102,105 103,104 103,102

## Silkscreen, mask and mechanical layers (free items; w line width, h text height)
F.SilkS:
  the board outline again, w0.254
  text "inv ~" at 112,184.25 h1.52
  text "GL2" at 84.5,147.017 h1.52
  text "GH1" at 87,126.017 h1.52
  text "V-" at 43.815,115.95 h1.52 r270
  text "GL1" at 84,104.517 h1.52
  text "V+" at 43.18,101.091 h1.52 r270